# Altium PCB NewXTX_2CPU.PcbDoc (part 2 of 2)
Units mm, origin at the board's own origin, x right, y up, seen from the top; angles counter-clockwise.
Board outline 290 x 98 mm, 2 copper layers (Top Layer, Bottom Layer); 222 components, 212 nets, 1642 pads, 0 vias.
Unrouted connection lines stored in the file: 376.
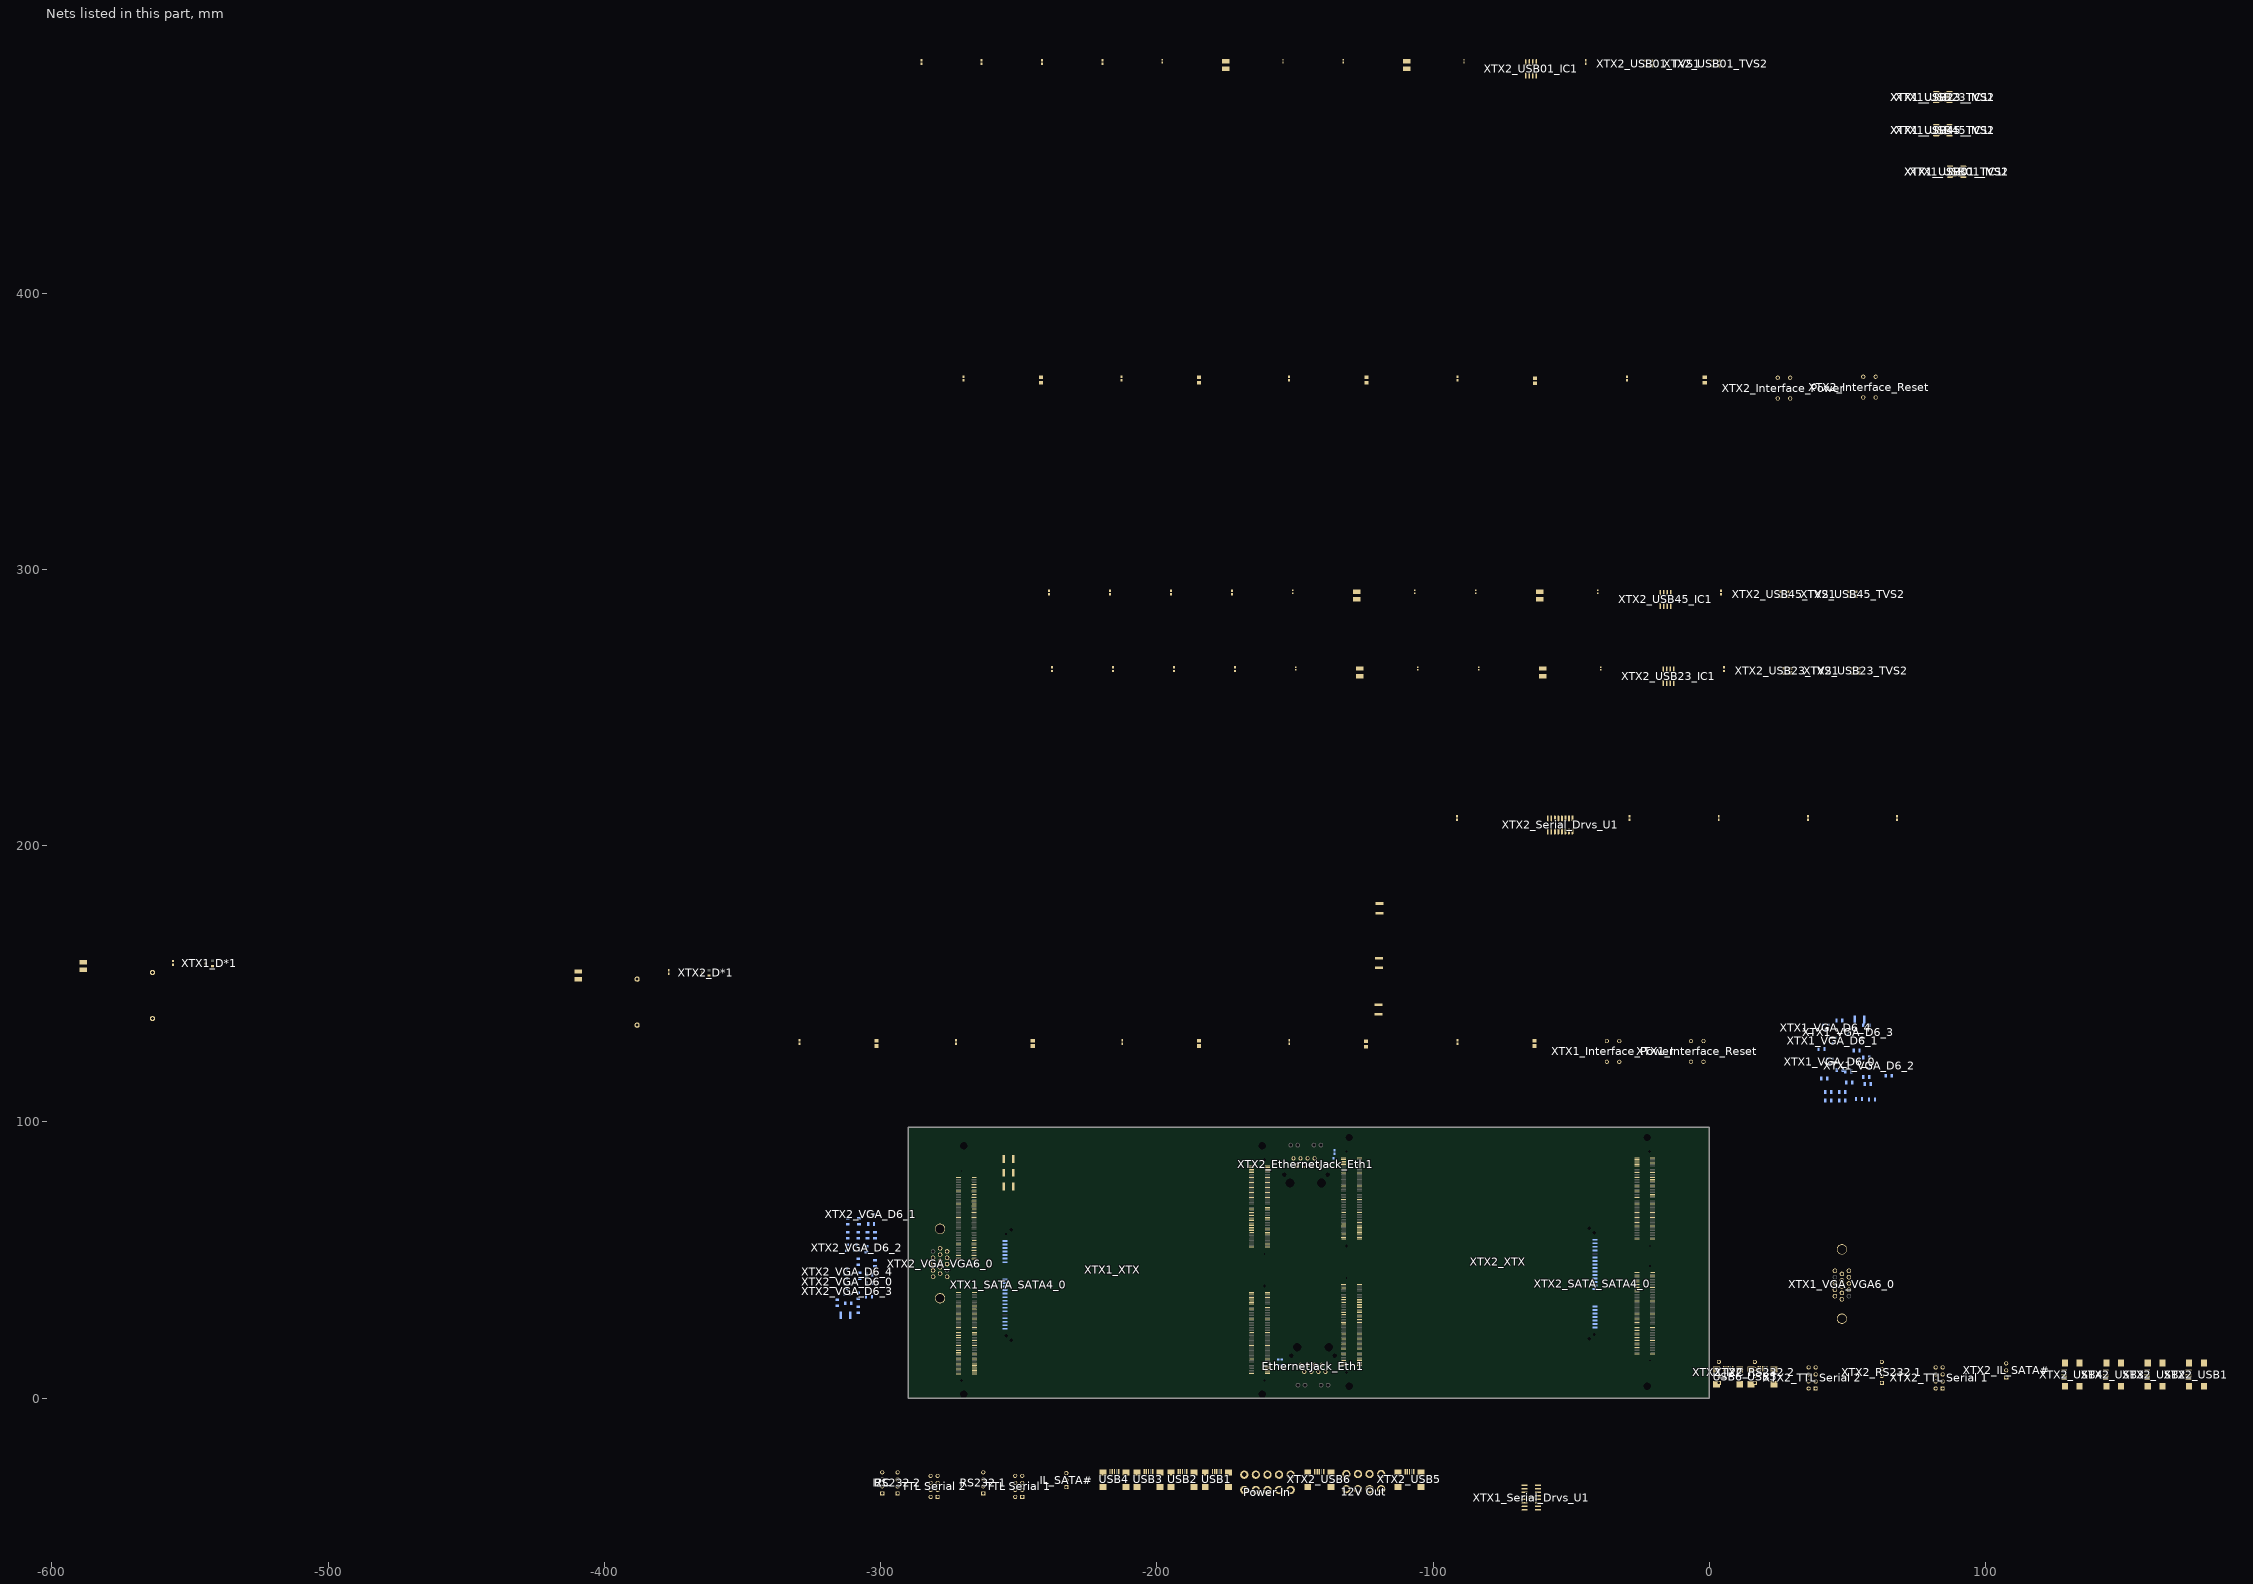
[diagram p2: the nets of this part, all layers, seen from the top]

## Footprints (in the part's own frame and the unit in brackets; to place one, negate y for a bottom-side part, rotate by r counter-clockwise, add the part's x,y. Pads: shape width x height; smd on the part's side, far side on the other; paste and mask are expansions set on the pad) (continued)
"R 0805 (2012) RESISTOR" [mm] "0805 (2012) Resistor"
  rect 0.85x1.4 smd: 1(-1.075,0) 2(1.075,0)
  silkscreen extent -1.78,-0.95 1.77,0.95, body extent -1.19,-0.65 1.19,0.65, height 0.85
"R 1210 (3225) RESISTOR" [mm] "1210 (3225) Resistor"
  rect 0.95x2.8 smd: 1(-1.725,0) 2(1.725,0)
  silkscreen extent -2.45,-1.62 2.45,1.65, body extent -1.83,-1.43 1.83,1.43, height 1.81
"SATA HDD" [mm] "FCI Part# 10029364 With HDD Holes and Screen"
  rect 1.9x0.65 smd: P1(-16.659,26.095) P2(-16.659,27.365) P3(-16.659,28.635) P4(-16.659,29.905) P5(-16.659,31.175) P6(-16.659,32.445) P7(-16.659,33.715) P8(-16.659,34.985) P9(-16.659,36.255) P10(-16.659,37.525) P11(-16.659,38.795) P12(-16.659,40.065) P13(-16.659,41.335) P14(-16.659,42.605) P15(-16.659,43.875) S1(-16.65,12.155) S2(-16.65,13.425) S3(-16.65,14.695) S4(-16.65,15.965) S5(-16.65,17.235) S6(-16.65,18.505) S7(-16.65,19.775)
  round 0 hole 0.95 unplated: ""(-16.3,9.6)
  round 0 hole 1.25 unplated: ""(-16.3,46.4) ""(-14.5,8) ""(-14.5,48)
  silkscreen extent -19.52,0 19.5,54, body extent -19.5,0 19.5,54, height 5.45
SOT23 [mm]
  rect 0.8x0.9 smd: 1(0.95,1) 2(-0.95,1) 3(0,-1)
  silkscreen extent -1.53,-0.7 1.53,0.7, body extent -1.52,-0.7 1.52,0.7, height 1.11
SOT143 [mm] "SOT-143; 4 Leads; Body 3 x 2.6 mm, inc. leads (LxW max)"
  rect 1.35x1.35 smd: 1(-0.75,-1.1)
  rect 0.9x1.35 smd: 2(0.95,-1.1) 3(0.95,1.1) 4(-0.95,1.1)
  silkscreen extent -1.87,-2.22 1.75,0.7
SOT-23 [mm] "SOT-23; 3 Leads; Body 3.0 x 2.6 mm, inc. leads (LxW max)"
  rect 0.9x0.95 smd: 1(-0.95,-1.25) 2(0.95,-1.25) 3(0,1.25)
  silkscreen extent -2.07,-1.38 1.3,1.25
UX60-MB-5ST [mm] "miniUSB Type B Connector - Metal Shield SMT With Positioning Post"
  rect 0.5x2 smd: 1(-1.6,-1) 2(-0.8,-1) 3(0,-1) 4(0.8,-1) 5(1.6,-1)
  rect 0x0 hole 0.9 unplated: 11(1.75,-3.25) 12(-1.75,-3.25)
  rect 2.5x2.2 smd: CGND(-4.2,-6.55) CGND(-4.2,-1.25) CGND(4.2,-6.55) CGND(4.2,-1.25)
  silkscreen extent -3.85,-9.72 3.85,-0.78, body extent -4.95,-9.55 4.95,-0.55, height 3.94
XTX_Board [mm]
  round 0 hole 0.7 unplated: 0(-111.85,41.65) 0(-111.85,87.45) 0(-2.025,53.25) 0(-2,11.65)
  round 0 hole 1.1 unplated: 0(-111.8,7.45) 0(-111.8,53.25) 0(-2.075,87.45) 0(-2.05,45.85)
  round 0 hole 2.7 unplated: 0(-110.9,2.45) 0(-110.9,92.45) 0(-2.9,92.45) 0(-2.9,2.45)
  rrect50% 1.8x0.35 smd: 1(-1,43.5) 2(-6.7,43.5) 3(-1,42.9) 4(-6.7,42.9) 5(-1,42.3) 6(-6.7,42.3) 7(-1,41.7) 8(-6.7,41.7) 9(-1,41.1) 10(-6.7,41.1) 11(-1,40.5) 12(-6.7,40.5) 13(-1,39.9) 14(-6.7,39.9) 15(-1,39.3) 16(-6.7,39.3) 17(-1,38.7) 18(-6.7,38.7) 19(-1,38.1) 20(-6.7,38.1) 21(-1,37.5) 22(-6.7,37.5) 23(-1,36.9) 24(-6.7,36.9) 25(-1,36.3) 26(-6.7,36.3) 27(-1,35.7) 28(-6.7,35.7) 29(-1,35.1) 30(-6.7,35.1) 31(-1,34.5) 32(-6.7,34.5) 33(-1,33.9) 34(-6.7,33.9) 35(-1,33.3) 36(-6.7,33.3) 37(-1,32.7) 38(-6.7,32.7) 39(-1,32.1) 40(-6.7,32.1) 41(-1,31.5) 42(-6.7,31.5) 43(-1,30.9) 44(-6.7,30.9) 45(-1,30.3) 46(-6.7,30.3) 47(-1,29.7) 48(-6.7,29.7) 49(-1,29.1) 50(-6.7,29.1) 51(-1,28.5) 52(-6.7,28.5) 53(-1,27.9) 54(-6.7,27.9) 55(-1,27.3) 56(-6.7,27.3) 57(-1,26.7) 58(-6.7,26.7) 59(-1,26.1) 60(-6.7,26.1) 61(-1,25.5) 62(-6.7,25.5) 63(-1,24.9) 64(-6.7,24.9) 65(-1,24.3) 66(-6.7,24.3) 67(-1,23.7) 68(-6.7,23.7) 69(-1,23.1) 70(-6.7,23.1) 71(-1,22.5) 72(-6.7,22.5) 73(-1,21.9) 74(-6.7,21.9) 75(-1,21.3) 76(-6.7,21.3) 77(-1,20.7) 78(-6.7,20.7) 79(-1,20.1) 80(-6.7,20.1) 81(-1,19.5) 82(-6.7,19.5) 83(-1,18.9) 84(-6.7,18.9) 85(-1,18.3) 86(-6.7,18.3) 87(-1,17.7) 88(-6.7,17.7) 89(-1,17.1) 90(-6.7,17.1) 91(-1,16.5) 92(-6.7,16.5) 93(-1,15.9) 94(-6.7,15.9) 95(-1,15.3) 96(-6.7,15.3) 97(-1,14.7) 98(-6.7,14.7) 99(-1,14.1) 100(-6.7,14.1) 101(-1.025,85.1) 102(-6.725,85.1) 103(-1.025,84.5) 104(-6.725,84.5) 105(-1.025,83.9) 106(-6.725,83.9) 107(-1.025,83.3) 108(-6.725,83.3) 109(-1.025,82.7) 110(-6.725,82.7) 111(-1.025,82.1) 112(-6.725,82.1) 113(-1.025,81.5) 114(-6.725,81.5) 115(-1.025,80.9) 116(-6.725,80.9) 117(-1.025,80.3) 118(-6.725,80.3) 119(-1.025,79.7) 120(-6.725,79.7) 121(-1.025,79.1) 122(-6.725,79.1) 123(-1.025,78.5) 124(-6.725,78.5) 125(-1.025,77.9) 126(-6.725,77.9) 127(-1.025,77.3) 128(-6.725,77.3) 129(-1.025,76.7) 130(-6.725,76.7) 131(-1.025,76.1) 132(-6.725,76.1) 133(-1.025,75.5) 134(-6.725,75.5) 135(-1.025,74.9) 136(-6.725,74.9) 137(-1.025,74.3) 138(-6.725,74.3) 139(-1.025,73.7) 140(-6.725,73.7) 141(-1.025,73.1) 142(-6.725,73.1) 143(-1.025,72.5) 144(-6.725,72.5) 145(-1.025,71.9) 146(-6.725,71.9) 147(-1.025,71.3) 148(-6.725,71.3) 149(-1.025,70.7) 150(-6.725,70.7) 151(-1.025,70.1) 152(-6.725,70.1) 153(-1.025,69.5) 154(-6.725,69.5) 155(-1.025,68.9) 156(-6.725,68.9) 157(-1.025,68.3) 158(-6.725,68.3) 159(-1.025,67.7) 160(-6.725,67.7) 161(-1.025,67.1) 162(-6.725,67.1) 163(-1.025,66.5) 164(-6.725,66.5) 165(-1.025,65.9) 166(-6.725,65.9) 167(-1.025,65.3) 168(-6.725,65.3) 169(-1.025,64.7) 170(-6.725,64.7) 171(-1.025,64.1) 172(-6.725,64.1) 173(-1.025,63.5) 174(-6.725,63.5) 175(-1.025,62.9) 176(-6.725,62.9) 177(-1.025,62.3) 178(-6.725,62.3) 179(-1.025,61.7) 180(-6.725,61.7) 181(-1.025,61.1) 182(-6.725,61.1) 183(-1.025,60.5) 184(-6.725,60.5) 185(-1.025,59.9) 186(-6.725,59.9) 187(-1.025,59.3) 188(-6.725,59.3) 189(-1.025,58.7) 190(-6.725,58.7) 191(-1.025,58.1) 192(-6.725,58.1) 193(-1.025,57.5) 194(-6.725,57.5) 195(-1.025,56.9) 196(-6.725,56.9) 197(-1.025,56.3) 198(-6.725,56.3) 199(-1.025,55.7) 200(-6.725,55.7) 201(-112.85,9.85) 202(-107.15,9.85) 203(-112.85,10.45) 204(-107.15,10.45) 205(-112.85,11.05) 206(-107.15,11.05) 207(-112.85,11.65) 208(-107.15,11.65) 209(-112.85,12.25) 210(-107.15,12.25) 211(-112.85,12.85) 212(-107.15,12.85) 213(-112.85,13.45) 214(-107.15,13.45) 215(-112.85,14.05) 216(-107.15,14.05) 217(-112.85,14.65) 218(-107.15,14.65) 219(-112.85,15.25) 220(-107.15,15.25) 221(-112.85,15.85) 222(-107.15,15.85) 223(-112.85,16.45) 224(-107.15,16.45) 225(-112.85,17.05) 226(-107.15,17.05) 227(-112.85,17.65) 228(-107.15,17.65) 229(-112.85,18.25) 230(-107.15,18.25) 231(-112.85,18.85) 232(-107.15,18.85) 233(-112.85,19.45) 234(-107.15,19.45) 235(-112.85,20.05) 236(-107.15,20.05) 237(-112.85,20.65) 238(-107.15,20.65) 239(-112.85,21.25) 240(-107.15,21.25) 241(-112.85,21.85) 242(-107.15,21.85) 243(-112.85,22.45) 244(-107.15,22.45) 245(-112.85,23.05) 246(-107.15,23.05) 247(-112.85,23.65) 248(-107.15,23.65) 249(-112.85,24.25) 250(-107.15,24.25) 251(-112.85,24.85) 252(-107.15,24.85) 253(-112.85,25.45) 254(-107.15,25.45) 255(-112.85,26.05) 256(-107.15,26.05) 257(-112.85,26.65) 258(-107.15,26.65) 259(-112.85,27.25) 260(-107.15,27.25) 261(-112.85,27.85) 262(-107.15,27.85) 263(-112.85,28.45) 264(-107.15,28.45) 265(-112.85,29.05) 266(-107.15,29.05) 267(-112.85,29.65) 268(-107.15,29.65) 269(-112.85,30.25) 270(-107.15,30.25) 271(-112.85,30.85) 272(-107.15,30.85) 273(-112.85,31.45) 274(-107.15,31.45) 275(-112.85,32.05) 276(-107.15,32.05) 277(-112.85,32.65) 278(-107.15,32.65) 279(-112.85,33.25) 280(-107.15,33.25) 281(-112.85,33.85) 282(-107.15,33.85) 283(-112.85,34.45) 284(-107.15,34.45) 285(-112.85,35.05) 286(-107.15,35.05) 287(-112.85,35.65) 288(-107.15,35.65) 289(-112.85,36.25) 290(-107.15,36.25) 291(-112.85,36.85) 292(-107.15,36.85) 293(-112.85,37.45) 294(-107.15,37.45) 295(-112.85,38.05) 296(-107.15,38.05) 297(-112.85,38.65) 298(-107.15,38.65) 299(-112.85,39.25) 300(-107.15,39.25) 301(-112.85,55.65) 302(-107.15,55.65) 303(-112.85,56.25) 304(-107.15,56.25) 305(-112.85,56.85) 306(-107.15,56.85) 307(-112.85,57.45) 308(-107.15,57.45) 309(-112.85,58.05) 310(-107.15,58.05) 311(-112.85,58.65) 312(-107.15,58.65) 313(-112.85,59.25) 314(-107.15,59.25) 315(-112.85,59.85) 316(-107.15,59.85) 317(-112.85,60.45) 318(-107.15,60.45) 319(-112.85,61.05) 320(-107.15,61.05) 321(-112.85,61.65) 322(-107.15,61.65) 323(-112.85,62.25) 324(-107.15,62.25) 325(-112.85,62.85) 326(-107.15,62.85) 327(-112.85,63.45) 328(-107.15,63.45) 329(-112.85,64.05) 330(-107.15,64.05) 331(-112.85,64.65) 332(-107.15,64.65) 333(-112.85,65.25) 334(-107.15,65.25) 335(-112.85,65.85) 336(-107.15,65.85) 337(-112.85,66.45) 338(-107.15,66.45) 339(-112.85,67.05) 340(-107.15,67.05) 341(-112.85,67.65) 342(-107.15,67.65) 343(-112.85,68.25) 344(-107.15,68.25) 345(-112.85,68.85) 346(-107.15,68.85) 347(-112.85,69.45) 348(-107.15,69.45) 349(-112.85,70.05) 350(-107.15,70.05) 351(-112.85,70.65) 352(-107.15,70.65) 353(-112.85,71.25) 354(-107.15,71.25) 355(-112.85,71.85) 356(-107.15,71.85) 357(-112.85,72.45) 358(-107.15,72.45) 359(-112.85,73.05) 360(-107.15,73.05) 361(-112.85,73.65) 362(-107.15,73.65) 363(-112.85,74.25) 364(-107.15,74.25) 365(-112.85,74.85) 366(-107.15,74.85) 367(-112.85,75.45) 368(-107.15,75.45) 369(-112.85,76.05) 370(-107.15,76.05) 371(-112.85,76.65) 372(-107.15,76.65) 373(-112.85,77.25) 374(-107.15,77.25) 375(-112.85,77.85) 376(-107.15,77.85) 377(-112.85,78.45) 378(-107.15,78.45) 379(-112.85,79.05) 380(-107.15,79.05) 381(-112.85,79.65) 382(-107.15,79.65) 383(-112.85,80.25) 384(-107.15,80.25) 385(-112.85,80.85) 386(-107.15,80.85) 387(-112.85,81.45) 388(-107.15,81.45) 389(-112.85,82.05) 390(-107.15,82.05) 391(-112.85,82.65) 392(-107.15,82.65) 393(-112.85,83.25) 394(-107.15,83.25) 395(-112.85,83.85) 396(-107.15,83.85) 397(-112.85,84.45) 398(-107.15,84.45) 399(-112.85,85.05) 400(-107.15,85.05)
  silkscreen extent -113.9,-0.05 0.1,94.95, body extent -114,0 0,95, height 19.2

## Part data
EthernetJack_C25 EthernetJack_C26 XTX1_C16 XTX1_Serial_Drvs_C20 XTX1_Serial_Drvs_C21 XTX1_Serial_Drvs_C22 XTX1_Serial_Drvs_C23 XTX1_Serial_Drvs_C24 XTX1_USB01_C1 XTX1_USB01_C2 XTX1_USB01_C3 XTX1_USB01_C4 XTX1_USB01_C5 XTX1_USB01_C6 XTX1_USB01_C7 XTX1_USB23_C1 XTX1_USB23_C2 XTX1_USB23_C3 XTX1_USB23_C4 XTX1_USB23_C5 XTX1_USB23_C6 XTX1_USB23_C7 XTX1_USB45_C1 XTX1_USB45_C2 XTX1_USB45_C3 XTX1_USB45_C4 XTX1_USB45_C5 XTX1_USB45_C6 XTX1_USB45_C7 XTX2_C16 XTX2_EthernetJack_C25 XTX2_EthernetJack_C26 XTX2_Serial_Drvs_C20 XTX2_Serial_Drvs_C21 XTX2_Serial_Drvs_C22 XTX2_Serial_Drvs_C23 XTX2_Serial_Drvs_C24 XTX2_USB01_C1 XTX2_USB01_C2 XTX2_USB01_C3 XTX2_USB01_C4 XTX2_USB01_C5 XTX2_USB01_C6 XTX2_USB01_C7 XTX2_USB23_C1 XTX2_USB23_C2 XTX2_USB23_C3 XTX2_USB23_C4 XTX2_USB23_C5 XTX2_USB23_C6 XTX2_USB23_C7 XTX2_USB45_C1 XTX2_USB45_C2 XTX2_USB45_C3 XTX2_USB45_C4 XTX2_USB45_C5 XTX2_USB45_C6 XTX2_USB45_C7: "Capacitor (Semiconductor SIM Model)"
EthernetJack_Eth1 XTX2_EthernetJack_Eth1: "Modular RJ45 Jack w/ Magnetics & LEDs"
I2C "RS232 1" "RS232 2" XTX2_I2C "XTX2_RS232 1" "XTX2_RS232 2": "Header, 4-Pin"
IL_SATA# XTX2_IL_SATA#: "Header, 3-Pin"
"TTL Serial 1" "TTL Serial 2" "XTX2_TTL Serial 1" "XTX2_TTL Serial 2": "Header, 4-Pin, Dual row"
USB1 USB2 USB3 USB4 USB5 USB6 XTX2_USB1 XTX2_USB2 XTX2_USB3 XTX2_USB4 XTX2_USB5 XTX2_USB6: "miniUSB Type B SMT Connector"
XTX1_BATT1 XTX2_BATT1: "16mm Battery Holder - Memory Protection Devices"
XTX1_D*1 XTX2_D*1: "Dual Surface Mount Switching Diode"
XTX1_Interface_5V "XTX1_Interface_Eth Act" "XTX1_Interface_Eth Lil" "XTX1_Interface_Eth Spd" XTX1_Interface_SATA XTX2_Interface_5V "XTX2_Interface_Eth Act" "XTX2_Interface_Eth Lil" "XTX2_Interface_Eth Spd" XTX2_Interface_SATA: "Typical RED, GREEN, YELLOW, AMBER GaAs LED"
XTX1_Interface_Power XTX1_Interface_Reset XTX2_Interface_Power XTX2_Interface_Reset: "FSM 6mm Series Switch"
XTX1_Interface_R14 XTX1_Interface_R15 XTX1_Interface_R16 XTX1_Interface_R17 XTX1_Interface_R18 XTX1_R8 XTX2_Interface_R14 XTX2_Interface_R15 XTX2_Interface_R16 XTX2_Interface_R17 XTX2_Interface_R18 XTX2_R8: "Semiconductor Resistor"
XTX1_SATA_C4_0 XTX1_SATA_C4_1 XTX1_SATA_C4_2 XTX1_VGA_C6_0 XTX1_VGA_C6_1 XTX1_VGA_C6_2 XTX1_VGA_C6_3 XTX1_VGA_C6_4 XTX1_VGA_C6_5 XTX1_VGA_C6_6 XTX1_VGA_C6_7 XTX2_SATA_C4_0 XTX2_SATA_C4_1 XTX2_SATA_C4_2 XTX2_VGA_C6_0 XTX2_VGA_C6_1 XTX2_VGA_C6_2 XTX2_VGA_C6_3 XTX2_VGA_C6_4 XTX2_VGA_C6_5 XTX2_VGA_C6_6 XTX2_VGA_C6_7: library part "Capacitor (non-polarized)", "Capacitor"
XTX1_SATA_SATA4_0 XTX2_SATA_SATA4_0: "SATA HDD, FCI Part# 10029364"
XTX1_Serial_Drvs_U1 XTX2_Serial_Drvs_U1: "+5V Powered, Multi-Channel RS-232 Driver/Receiver"
XTX1_USB01_IC1 XTX1_USB23_IC1 XTX1_USB45_IC1 XTX2_USB01_IC1 XTX2_USB23_IC1 XTX2_USB45_IC1: library part MIC2026, "Micrel MIC2026 Dual-Channel Power Distribution Switch"
XTX1_USB01_TVS1 XTX1_USB01_TVS2 XTX1_USB23_TVS1 XTX1_USB23_TVS2 XTX1_USB45_TVS1 XTX1_USB45_TVS2 XTX2_USB01_TVS1 XTX2_USB01_TVS2 XTX2_USB23_TVS1 XTX2_USB23_TVS2 XTX2_USB45_TVS1 XTX2_USB45_TVS2: "IC TVS ARRAY 2-LINE 5V SOT-143"
XTX1_VGA_D6_0 XTX1_VGA_D6_3 XTX2_VGA_D6_0 XTX2_VGA_D6_3: library part "Dual Schottky Diode", "Dual Schottky Diode"
XTX1_VGA_FB6_0 XTX1_VGA_FB6_1 XTX1_VGA_FB6_2 XTX1_VGA_FB6_3 XTX1_VGA_FB6_4 XTX1_VGA_FB6_5 XTX1_VGA_FB6_6 XTX1_VGA_FB6_7 XTX2_VGA_FB6_0 XTX2_VGA_FB6_1 XTX2_VGA_FB6_2 XTX2_VGA_FB6_3 XTX2_VGA_FB6_4 XTX2_VGA_FB6_5 XTX2_VGA_FB6_6 XTX2_VGA_FB6_7: library part "Ferrite Beads", "Ferrite Beads"
XTX1_VGA_R6_0 XTX1_VGA_R6_1 XTX1_VGA_R6_2 XTX1_VGA_R6_3 XTX2_VGA_R6_0 XTX2_VGA_R6_1 XTX2_VGA_R6_2 XTX2_VGA_R6_3: library part Resistor, "Resistor"
XTX1_VGA_VGA6_0 XTX2_VGA_VGA6_0: "DSub15 Connector Tyco PN 1734344"

## Nets (pads, with @x,y where several pads share a name; then routed paths per layer and width w, separated by ;. In a path a pad name is that pad's centre, name@x,y a point inside that pad or via, vN(x,y) a via of type N, cw(c..) or ccw(c..) an arc to the next point about the centre after c; other vN are vias at no path point)
3.3VCC: XTX1_SATA_C4_0.2 XTX1_SATA_C4_1.2 XTX1_SATA_C4_2.2 XTX1_SATA_SATA4_0.P1 XTX1_SATA_SATA4_0.P2 XTX1_SATA_SATA4_0.P3 XTX1_VGA_D6_0.2 XTX1_VGA_D6_1.2 XTX1_VGA_D6_2.2 XTX1_VGA_D6_3.2 XTX1_VGA_D6_4.2 XTX1_VGA_FB6_3.1 XTX1_XTX.12 XTX1_XTX.16 XTX1_XTX.24 XTX2_SATA_C4_0.2 XTX2_SATA_C4_1.2 XTX2_SATA_C4_2.2 XTX2_SATA_SATA4_0.P1 XTX2_SATA_SATA4_0.P2 XTX2_SATA_SATA4_0.P3 XTX2_VGA_D6_0.2 XTX2_VGA_D6_1.2 XTX2_VGA_D6_2.2 XTX2_VGA_D6_3.2 XTX2_VGA_D6_4.2 XTX2_VGA_FB6_3.1 XTX2_XTX.12 XTX2_XTX.16 XTX2_XTX.24
5VCC: XTX1_Interface_5V.1 XTX1_Interface_R14.1 XTX1_Interface_R15.1 XTX1_Interface_R16.1 XTX1_Interface_R17.1 XTX1_SATA_SATA4_0.P7 XTX1_SATA_SATA4_0.P8 XTX1_SATA_SATA4_0.P9 XTX1_Serial_Drvs_C22.1 XTX1_Serial_Drvs_C23.1 XTX1_Serial_Drvs_U1.16 XTX1_XTX.19 XTX1_XTX.20 XTX1_XTX.51 XTX1_XTX.52 XTX1_XTX.83 XTX1_XTX.84 XTX1_XTX.114 XTX1_XTX.119 XTX1_XTX.120 XTX1_XTX.151 XTX1_XTX.152 XTX1_XTX.174 XTX1_XTX.180 XTX1_XTX.183 XTX1_XTX.184 XTX1_XTX.239 XTX1_XTX.240 XTX1_XTX.251 XTX1_XTX.253 XTX1_XTX.281 XTX1_XTX.282 XTX1_XTX.303 XTX1_XTX.317 XTX1_XTX.318 XTX1_XTX.349 XTX1_XTX.350 XTX1_XTX.381 XTX1_XTX.382 XTX2_Interface_5V.1 XTX2_Interface_R14.1 XTX2_Interface_R15.1 XTX2_Interface_R16.1 XTX2_Interface_R17.1 XTX2_SATA_SATA4_0.P7 XTX2_SATA_SATA4_0.P8 XTX2_SATA_SATA4_0.P9 XTX2_Serial_Drvs_C22.1 XTX2_Serial_Drvs_C23.1 XTX2_Serial_Drvs_U1.16 XTX2_XTX.19 XTX2_XTX.20 XTX2_XTX.51 XTX2_XTX.52 XTX2_XTX.83 XTX2_XTX.84 XTX2_XTX.114 XTX2_XTX.119 XTX2_XTX.120 XTX2_XTX.151 XTX2_XTX.152 XTX2_XTX.174 XTX2_XTX.180 XTX2_XTX.183 XTX2_XTX.184 XTX2_XTX.239 XTX2_XTX.240 XTX2_XTX.251 XTX2_XTX.253 XTX2_XTX.281 XTX2_XTX.282 XTX2_XTX.303 XTX2_XTX.317 XTX2_XTX.318 XTX2_XTX.349 XTX2_XTX.350 XTX2_XTX.381 XTX2_XTX.382
12VCC: "12V Out.1" "12V Out.2" "12V Out.3" "12V Out.4" "Power In.1" "Power In.6" XTX1_SATA_SATA4_0.P13 XTX1_SATA_SATA4_0.P14 XTX1_SATA_SATA4_0.P15 XTX2_SATA_SATA4_0.P13 XTX2_SATA_SATA4_0.P14 XTX2_SATA_SATA4_0.P15
GND: "12V Out.5" "12V Out.6" "12V Out.7" "12V Out.8" "Power In.4" "Power In.5" "Power In.9" "Power In.10" "RS232 1.4" "RS232 2.4" "TTL Serial 1.7" "TTL Serial 1.8" "TTL Serial 2.7" "TTL Serial 2.8" "XTX2_RS232 1.4" "XTX2_RS232 2.4" "XTX2_TTL Serial 1.7" "XTX2_TTL Serial 1.8" "XTX2_TTL Serial 2.7" "XTX2_TTL Serial 2.8" EthernetJack_C25.1 EthernetJack_C26.1 EthernetJack_Eth1.4 EthernetJack_Eth1.5 I2C.4 IL_SATA#.3 XTX1_BATT1.- XTX1_C16.1 XTX1_Interface_Power.3 XTX1_Interface_Power.4 XTX1_Interface_R18.1 XTX1_Interface_Reset.3 XTX1_Interface_Reset.4 XTX1_SATA_C4_0.1 XTX1_SATA_C4_1.1 XTX1_SATA_C4_2.1 XTX1_SATA_SATA4_0.P4 XTX1_SATA_SATA4_0.P5 XTX1_SATA_SATA4_0.P6 XTX1_SATA_SATA4_0.P10 XTX1_SATA_SATA4_0.P12 XTX1_SATA_SATA4_0.S1 XTX1_SATA_SATA4_0.S4 XTX1_SATA_SATA4_0.S7 XTX1_Serial_Drvs_C23.2 XTX1_Serial_Drvs_C24.2 XTX1_Serial_Drvs_U1.15 XTX1_USB01_C1.1 XTX1_USB01_C2.1 XTX1_USB01_C3.1 XTX1_USB01_C4.1 XTX1_USB01_C5.1 XTX1_USB01_C6.1 XTX1_USB01_C7.1 XTX1_USB01_IC1.6 XTX1_USB01_L2.1 XTX1_USB01_L4.1 XTX1_USB01_TVS1.1 XTX1_USB01_TVS2.4 XTX1_USB23_C1.1 XTX1_USB23_C2.1 XTX1_USB23_C3.1 XTX1_USB23_C4.1 XTX1_USB23_C5.1 XTX1_USB23_C6.1 XTX1_USB23_C7.1 XTX1_USB23_IC1.6 XTX1_USB23_L2.1 XTX1_USB23_L4.1 XTX1_USB23_TVS1.1 XTX1_USB23_TVS2.4 XTX1_USB45_C1.1 XTX1_USB45_C2.1 XTX1_USB45_C3.1 XTX1_USB45_C4.1 XTX1_USB45_C5.1 XTX1_USB45_C6.1 XTX1_USB45_C7.1 XTX1_USB45_IC1.6 XTX1_USB45_L2.1 XTX1_USB45_L4.1 XTX1_USB45_TVS1.1 XTX1_USB45_TVS2.4 XTX1_VGA_C6_0.2 XTX1_VGA_C6_1.2 XTX1_VGA_C6_2.2 XTX1_VGA_C6_3.2 XTX1_VGA_C6_4.2 XTX1_VGA_C6_5.2 XTX1_VGA_C6_6.1 XTX1_VGA_C6_7.1 XTX1_VGA_D6_0.1 XTX1_VGA_D6_1.1 XTX1_VGA_D6_2.1 XTX1_VGA_D6_3.1 XTX1_VGA_D6_4.1 XTX1_VGA_R6_0.1 XTX1_VGA_R6_1.1 XTX1_VGA_R6_2.1 XTX1_VGA_R6_3.1 XTX1_VGA_VGA6_0.5 XTX1_VGA_VGA6_0.6 XTX1_VGA_VGA6_0.7 XTX1_VGA_VGA6_0.8 XTX1_VGA_VGA6_0.10 XTX1_XTX.1 XTX1_XTX.2 XTX1_XTX.5 XTX1_XTX.6 XTX1_XTX.35 XTX1_XTX.36 XTX1_XTX.67 XTX1_XTX.68 XTX1_XTX.99 XTX1_XTX.100 XTX1_XTX.101 XTX1_XTX.102 XTX1_XTX.107 XTX1_XTX.108 XTX1_XTX.113 XTX1_XTX.126 XTX1_XTX.129 XTX1_XTX.135 XTX1_XTX.136 XTX1_XTX.142 XTX1_XTX.157 XTX1_XTX.167 XTX1_XTX.168 XTX1_XTX.173 XTX1_XTX.199 XTX1_XTX.200 XTX1_XTX.201 XTX1_XTX.202 XTX1_XTX.215 XTX1_XTX.216 XTX1_XTX.221 XTX1_XTX.222 XTX1_XTX.227 XTX1_XTX.228 XTX1_XTX.233 XTX1_XTX.234 XTX1_XTX.254 XTX1_XTX.265 XTX1_XTX.266 XTX1_XTX.299 XTX1_XTX.300 XTX1_XTX.301 XTX1_XTX.302 XTX1_XTX.333 XTX1_XTX.334 XTX1_XTX.365 XTX1_XTX.366 XTX1_XTX.399 XTX1_XTX.400 XTX2_BATT1.- XTX2_C16.1 XTX2_EthernetJack_C25.1 XTX2_EthernetJack_C26.1 XTX2_EthernetJack_Eth1.4 XTX2_EthernetJack_Eth1.5 XTX2_I2C.4 XTX2_IL_SATA#.3 XTX2_Interface_Power.3 XTX2_Interface_Power.4 XTX2_Interface_R18.1 XTX2_Interface_Reset.3 XTX2_Interface_Reset.4 XTX2_SATA_C4_0.1 XTX2_SATA_C4_1.1 XTX2_SATA_C4_2.1 XTX2_SATA_SATA4_0.P4 XTX2_SATA_SATA4_0.P5 XTX2_SATA_SATA4_0.P6 XTX2_SATA_SATA4_0.P10 XTX2_SATA_SATA4_0.P12 XTX2_SATA_SATA4_0.S1 XTX2_SATA_SATA4_0.S4 XTX2_SATA_SATA4_0.S7 XTX2_Serial_Drvs_C23.2 XTX2_Serial_Drvs_C24.2 XTX2_Serial_Drvs_U1.15 XTX2_USB01_C1.1 XTX2_USB01_C2.1 XTX2_USB01_C3.1 XTX2_USB01_C4.1 XTX2_USB01_C5.1 XTX2_USB01_C6.1 XTX2_USB01_C7.1 XTX2_USB01_IC1.6 XTX2_USB01_L2.1 XTX2_USB01_L4.1 XTX2_USB01_TVS1.1 XTX2_USB01_TVS2.4 XTX2_USB23_C1.1 XTX2_USB23_C2.1 XTX2_USB23_C3.1 XTX2_USB23_C4.1 XTX2_USB23_C5.1 XTX2_USB23_C6.1 XTX2_USB23_C7.1 XTX2_USB23_IC1.6 XTX2_USB23_L2.1 XTX2_USB23_L4.1 XTX2_USB23_TVS1.1 XTX2_USB23_TVS2.4 XTX2_USB45_C1.1 XTX2_USB45_C2.1 XTX2_USB45_C3.1 XTX2_USB45_C4.1 XTX2_USB45_C5.1 XTX2_USB45_C6.1 XTX2_USB45_C7.1 XTX2_USB45_IC1.6 XTX2_USB45_L2.1 XTX2_USB45_L4.1 XTX2_USB45_TVS1.1 XTX2_USB45_TVS2.4 XTX2_VGA_C6_0.2 XTX2_VGA_C6_1.2 XTX2_VGA_C6_2.2 XTX2_VGA_C6_3.2 XTX2_VGA_C6_4.2 XTX2_VGA_C6_5.2 XTX2_VGA_C6_6.1 XTX2_VGA_C6_7.1 XTX2_VGA_D6_0.1 XTX2_VGA_D6_1.1 XTX2_VGA_D6_2.1 XTX2_VGA_D6_3.1 XTX2_VGA_D6_4.1 XTX2_VGA_R6_0.1 XTX2_VGA_R6_1.1 XTX2_VGA_R6_2.1 XTX2_VGA_R6_3.1 XTX2_VGA_VGA6_0.5 XTX2_VGA_VGA6_0.6 XTX2_VGA_VGA6_0.7 XTX2_VGA_VGA6_0.8 XTX2_VGA_VGA6_0.10 XTX2_XTX.1 XTX2_XTX.2 XTX2_XTX.5 XTX2_XTX.6 XTX2_XTX.35 XTX2_XTX.36 XTX2_XTX.67 XTX2_XTX.68 XTX2_XTX.99 XTX2_XTX.100 XTX2_XTX.101 XTX2_XTX.102 XTX2_XTX.107 XTX2_XTX.108 XTX2_XTX.113 XTX2_XTX.126 XTX2_XTX.129 XTX2_XTX.135 XTX2_XTX.136 XTX2_XTX.142 XTX2_XTX.157 XTX2_XTX.167 XTX2_XTX.168 XTX2_XTX.173 XTX2_XTX.199 XTX2_XTX.200 XTX2_XTX.201 XTX2_XTX.202 XTX2_XTX.215 XTX2_XTX.216 XTX2_XTX.221 XTX2_XTX.222 XTX2_XTX.227 XTX2_XTX.228 XTX2_XTX.233 XTX2_XTX.234 XTX2_XTX.254 XTX2_XTX.265 XTX2_XTX.266 XTX2_XTX.299 XTX2_XTX.300 XTX2_XTX.301 XTX2_XTX.302 XTX2_XTX.333 XTX2_XTX.334 XTX2_XTX.365 XTX2_XTX.366 XTX2_XTX.399 XTX2_XTX.400
NetEthernetJack_C25_2: EthernetJack_C25.2 EthernetJack_Eth1.3
NetEthernetJack_C26_2: EthernetJack_C26.2 EthernetJack_Eth1.6
NetXTX1_BATT1_+: XTX1_BATT1.+ XTX1_D*1.1
NetXTX1_C16_2: XTX1_C16.2 XTX1_D*1.3 XTX1_R8.2
NetXTX1_Interface_5V_2: XTX1_Interface_5V.2 XTX1_Interface_R18.2
"NetXTX1_Interface_Eth Act_1": "XTX1_Interface_Eth Act.1" XTX1_Interface_R15.2
"NetXTX1_Interface_Eth Lil_1": "XTX1_Interface_Eth Lil.1" XTX1_Interface_R16.2
"NetXTX1_Interface_Eth Spd_1": "XTX1_Interface_Eth Spd.1" XTX1_Interface_R14.2
NetXTX1_Interface_R17_2: XTX1_Interface_R17.2 XTX1_Interface_SATA.1
NetXTX1_R8_1: XTX1_R8.1 XTX1_XTX.308
NetXTX1_Serial_Drvs_C20_1: XTX1_Serial_Drvs_C20.1 XTX1_Serial_Drvs_U1.4
NetXTX1_Serial_Drvs_C20_2: XTX1_Serial_Drvs_C20.2 XTX1_Serial_Drvs_U1.5
NetXTX1_Serial_Drvs_C21_1: XTX1_Serial_Drvs_C21.1 XTX1_Serial_Drvs_U1.1
NetXTX1_Serial_Drvs_C21_2: XTX1_Serial_Drvs_C21.2 XTX1_Serial_Drvs_U1.3
NetXTX1_Serial_Drvs_C22_2: XTX1_Serial_Drvs_C22.2 XTX1_Serial_Drvs_U1.2
NetXTX1_Serial_Drvs_C24_1: XTX1_Serial_Drvs_C24.1 XTX1_Serial_Drvs_U1.6
NetXTX1_USB01_C2_2: XTX1_USB01_C2.2 XTX1_USB01_IC1.5 XTX1_USB01_L1.1
NetXTX1_USB01_C3_2: XTX1_USB01_C3.2 XTX1_USB01_IC1.8 XTX1_USB01_L3.1
NetXTX1_USB23_C2_2: XTX1_USB23_C2.2 XTX1_USB23_IC1.5 XTX1_USB23_L1.1
NetXTX1_USB23_C3_2: XTX1_USB23_C3.2 XTX1_USB23_IC1.8 XTX1_USB23_L3.1
NetXTX1_USB45_C2_2: XTX1_USB45_C2.2 XTX1_USB45_IC1.5 XTX1_USB45_L1.1
NetXTX1_USB45_C3_2: XTX1_USB45_C3.2 XTX1_USB45_IC1.8 XTX1_USB45_L3.1
NetXTX1_VGA_FB6_3_2: XTX1_VGA_FB6_3.2 XTX1_VGA_VGA6_0.9
NetXTX2_BATT1_+: XTX2_BATT1.+ XTX2_D*1.1
NetXTX2_C16_2: XTX2_C16.2 XTX2_D*1.3 XTX2_R8.2
NetXTX2_EthernetJack_C25_2: XTX2_EthernetJack_C25.2 XTX2_EthernetJack_Eth1.3
NetXTX2_EthernetJack_C26_2: XTX2_EthernetJack_C26.2 XTX2_EthernetJack_Eth1.6
NetXTX2_Interface_5V_2: XTX2_Interface_5V.2 XTX2_Interface_R18.2
"NetXTX2_Interface_Eth Act_1": "XTX2_Interface_Eth Act.1" XTX2_Interface_R15.2
"NetXTX2_Interface_Eth Lil_1": "XTX2_Interface_Eth Lil.1" XTX2_Interface_R16.2
"NetXTX2_Interface_Eth Spd_1": "XTX2_Interface_Eth Spd.1" XTX2_Interface_R14.2
NetXTX2_Interface_R17_2: XTX2_Interface_R17.2 XTX2_Interface_SATA.1
NetXTX2_R8_1: XTX2_R8.1 XTX2_XTX.308
NetXTX2_Serial_Drvs_C20_1: XTX2_Serial_Drvs_C20.1 XTX2_Serial_Drvs_U1.4
NetXTX2_Serial_Drvs_C20_2: XTX2_Serial_Drvs_C20.2 XTX2_Serial_Drvs_U1.5
NetXTX2_Serial_Drvs_C21_1: XTX2_Serial_Drvs_C21.1 XTX2_Serial_Drvs_U1.1
NetXTX2_Serial_Drvs_C21_2: XTX2_Serial_Drvs_C21.2 XTX2_Serial_Drvs_U1.3
NetXTX2_Serial_Drvs_C22_2: XTX2_Serial_Drvs_C22.2 XTX2_Serial_Drvs_U1.2
NetXTX2_Serial_Drvs_C24_1: XTX2_Serial_Drvs_C24.1 XTX2_Serial_Drvs_U1.6
NetXTX2_USB01_C2_2: XTX2_USB01_C2.2 XTX2_USB01_IC1.5 XTX2_USB01_L1.1
NetXTX2_USB01_C3_2: XTX2_USB01_C3.2 XTX2_USB01_IC1.8 XTX2_USB01_L3.1
NetXTX2_USB23_C2_2: XTX2_USB23_C2.2 XTX2_USB23_IC1.5 XTX2_USB23_L1.1
NetXTX2_USB23_C3_2: XTX2_USB23_C3.2 XTX2_USB23_IC1.8 XTX2_USB23_L3.1
NetXTX2_USB45_C2_2: XTX2_USB45_C2.2 XTX2_USB45_IC1.5 XTX2_USB45_L1.1
NetXTX2_USB45_C3_2: XTX2_USB45_C3.2 XTX2_USB45_IC1.8 XTX2_USB45_L3.1
NetXTX2_VGA_FB6_3_2: XTX2_VGA_FB6_3.2 XTX2_VGA_VGA6_0.9
VCC: "Power In.2" "Power In.3" "Power In.7" "Power In.8" "RS232 1.1" "RS232 2.1" "TTL Serial 1.1" "TTL Serial 1.2" "TTL Serial 2.1" "TTL Serial 2.2" "XTX2_RS232 1.1" "XTX2_RS232 2.1" "XTX2_TTL Serial 1.1" "XTX2_TTL Serial 1.2" "XTX2_TTL Serial 2.1" "XTX2_TTL Serial 2.2" I2C.1 IL_SATA#.1 XTX1_USB01_C1.2 XTX1_USB01_IC1.1 XTX1_USB01_IC1.4 XTX1_USB01_IC1.7 XTX1_USB01_TVS1.4 XTX1_USB01_TVS2.1 XTX1_USB23_C1.2 XTX1_USB23_IC1.1 XTX1_USB23_IC1.4 XTX1_USB23_IC1.7 XTX1_USB23_TVS1.4 XTX1_USB23_TVS2.1 XTX1_USB45_C1.2 XTX1_USB45_IC1.1 XTX1_USB45_IC1.4 XTX1_USB45_IC1.7 XTX1_USB45_TVS1.4 XTX1_USB45_TVS2.1 XTX2_I2C.1 XTX2_IL_SATA#.1 XTX2_USB01_C1.2 XTX2_USB01_IC1.1 XTX2_USB01_IC1.4 XTX2_USB01_IC1.7 XTX2_USB01_TVS1.4 XTX2_USB01_TVS2.1 XTX2_USB23_C1.2 XTX2_USB23_IC1.1 XTX2_USB23_IC1.4 XTX2_USB23_IC1.7 XTX2_USB23_TVS1.4 XTX2_USB23_TVS2.1 XTX2_USB45_C1.2 XTX2_USB45_IC1.1 XTX2_USB45_IC1.4 XTX2_USB45_IC1.7 XTX2_USB45_TVS1.4 XTX2_USB45_TVS2.1
XTX1_B: XTX1_XTX.204
XTX1_DDCK: XTX1_XTX.208
XTX1_DDDA: XTX1_XTX.210
XTX1_ETH_ACTLED#: "XTX1_Interface_Eth Act.2" XTX1_XTX.312
XTX1_ETH_LILED#: "XTX1_Interface_Eth Lil.2" XTX1_XTX.310
XTX1_ETH_RXD_N: EthernetJack_Eth1.8 XTX1_XTX.391
XTX1_ETH_RXD_P: EthernetJack_Eth1.7 XTX1_XTX.393
XTX1_ETH_SPEEDLED#: "XTX1_Interface_Eth Spd.2" XTX1_XTX.314
XTX1_ETH_TXD_N: EthernetJack_Eth1.2 XTX1_XTX.395
XTX1_ETH_TXD_P: EthernetJack_Eth1.1 XTX1_XTX.397
XTX1_G: XTX1_XTX.206
XTX1_HSY: XTX1_XTX.205
XTX1_I2C_CLK: I2C.3 XTX1_XTX.316
XTX1_I2C_DATA: I2C.2 XTX1_XTX.322
XTX1_IL_SATA#: IL_SATA#.2 XTX1_XTX.158
XTX1_Interface_PWGIN: XTX1_Interface_Power.1 XTX1_Interface_Power.2 XTX1_XTX.304
XTX1_Interface_PWRBTN#: XTX1_Interface_Reset.1 XTX1_Interface_Reset.2 XTX1_XTX.307
XTX1_PD0: XTX1_XTX.280
XTX1_PD1: XTX1_XTX.278
XTX1_PD2: XTX1_XTX.276
XTX1_PD3: XTX1_XTX.274
XTX1_PD4: XTX1_XTX.272
XTX1_PD5: XTX1_XTX.268
XTX1_PD6: XTX1_XTX.262
XTX1_PD7: XTX1_XTX.258
XTX1_R: XTX1_XTX.203
XTX1_RXD1: "TTL Serial 1.3" XTX1_XTX.283
XTX1_RXD2: "TTL Serial 2.3" XTX1_XTX.263
XTX1_SATA0_RX_N: XTX1_SATA_SATA4_0.S5 XTX1_XTX.106
XTX1_SATA0_RX_P: XTX1_SATA_SATA4_0.S6 XTX1_XTX.104
XTX1_SATA0_TX_N: XTX1_SATA_SATA4_0.S3 XTX1_XTX.110
XTX1_SATA0_TX_P: XTX1_SATA_SATA4_0.S2 XTX1_XTX.112
XTX1_SATALED#: XTX1_Interface_SATA.2 XTX1_XTX.150
XTX1_Serial_Drvs_IN_RX1: "TTL Serial 1.4" XTX1_Serial_Drvs_U1.12
XTX1_Serial_Drvs_IN_RX2: "TTL Serial 2.4" XTX1_Serial_Drvs_U1.9
XTX1_Serial_Drvs_IN_TX1: "TTL Serial 1.6" XTX1_Serial_Drvs_U1.11
XTX1_Serial_Drvs_IN_TX2: "TTL Serial 2.6" XTX1_Serial_Drvs_U1.10
XTX1_Serial_Drvs_OUT_RX1: "RS232 1.2" XTX1_Serial_Drvs_U1.13
XTX1_Serial_Drvs_OUT_RX2: "RS232 2.2" XTX1_Serial_Drvs_U1.8
XTX1_Serial_Drvs_OUT_TX1: "RS232 1.3" XTX1_Serial_Drvs_U1.14
XTX1_Serial_Drvs_OUT_TX2: "RS232 2.3" XTX1_Serial_Drvs_U1.7
XTX1_TXD1: "TTL Serial 1.5" XTX1_XTX.295
XTX1_TXD2: "TTL Serial 2.5" XTX1_XTX.277
XTX1_USB0.5V: USB1.1 XTX1_USB01_C7.2 XTX1_USB01_L1.2
XTX1_USB0.D_N: USB1.2 XTX1_USB01_TVS1.2 XTX1_XTX.76
XTX1_USB0.D_P: USB1.3 XTX1_USB01_TVS1.3 XTX1_XTX.88
XTX1_USB0.GND: USB1.5 USB1.CGND XTX1_USB01_C6.2 XTX1_USB01_L2.2
XTX1_USB1.5V: USB2.1 XTX1_USB01_C5.2 XTX1_USB01_L3.2
XTX1_USB1.D_N: USB2.2 XTX1_USB01_TVS2.2 XTX1_XTX.80
XTX1_USB1.D_P: USB2.3 XTX1_USB01_TVS2.3 XTX1_XTX.92
XTX1_USB1.GND: USB2.5 USB2.CGND XTX1_USB01_C4.2 XTX1_USB01_L4.2
XTX1_USB2.5V: USB3.1 XTX1_USB23_C7.2 XTX1_USB23_L1.2
XTX1_USB2.D_N: USB3.2 XTX1_USB23_TVS1.2 XTX1_XTX.58
XTX1_USB2.D_P: USB3.3 XTX1_USB23_TVS1.3 XTX1_XTX.66
XTX1_USB2.GND: USB3.5 USB3.CGND XTX1_USB23_C6.2 XTX1_USB23_L2.2
XTX1_USB3.5V: USB4.1 XTX1_USB23_C5.2 XTX1_USB23_L3.2
XTX1_USB3.D_N: USB4.2 XTX1_USB23_TVS2.2 XTX1_XTX.62
XTX1_USB3.D_P: USB4.3 XTX1_USB23_TVS2.3 XTX1_XTX.72
XTX1_USB3.GND: USB4.5 USB4.CGND XTX1_USB23_C4.2 XTX1_USB23_L4.2
XTX1_USB4.5V: USB6.1 XTX1_USB45_C5.2 XTX1_USB45_L3.2
XTX1_USB4.D_N: USB6.2 XTX1_USB45_TVS2.2 XTX1_XTX.147
XTX1_USB4.D_P: USB6.3 XTX1_USB45_TVS2.3 XTX1_XTX.145
XTX1_USB4.GND: USB6.5 USB6.CGND XTX1_USB45_C4.2 XTX1_USB45_L4.2
XTX1_USB5.5V: USB5.1 XTX1_USB45_C7.2 XTX1_USB45_L1.2
XTX1_USB5.D_N: USB5.2 XTX1_USB45_TVS1.2 XTX1_XTX.127
XTX1_USB5.D_P: USB5.3 XTX1_USB45_TVS1.3 XTX1_XTX.125
XTX1_USB5.GND: USB5.5 USB5.CGND XTX1_USB45_C6.2 XTX1_USB45_L2.2
XTX1_USB_OVCR#: XTX1_USB01_IC1.2 XTX1_USB01_IC1.3 XTX1_USB23_IC1.2 XTX1_USB23_IC1.3 XTX1_USB45_IC1.2 XTX1_USB45_IC1.3 XTX1_XTX.319
XTX1_VGA_BFILTERED: XTX1_VGA_C6_5.1 XTX1_VGA_FB6_2.2 XTX1_VGA_VGA6_0.3
XTX1_VGA_BIN: XTX1_VGA_C6_2.1 XTX1_VGA_D6_2.3 XTX1_VGA_FB6_2.1 XTX1_VGA_R6_2.2
XTX1_VGA_DDCKF: XTX1_VGA_FB6_7.2 XTX1_VGA_VGA6_0.15
XTX1_VGA_DDCKIN: XTX1_VGA_FB6_7.1
XTX1_VGA_DDDAF: XTX1_VGA_FB6_4.2 XTX1_VGA_VGA6_0.12
XTX1_VGA_DDDAIN: XTX1_VGA_FB6_4.1
XTX1_VGA_GFILTERED: XTX1_VGA_C6_4.1 XTX1_VGA_FB6_1.2 XTX1_VGA_VGA6_0.2
XTX1_VGA_GIN: XTX1_VGA_C6_1.1 XTX1_VGA_D6_1.3 XTX1_VGA_FB6_1.1 XTX1_VGA_R6_1.2
XTX1_VGA_HSYF: XTX1_VGA_C6_6.2 XTX1_VGA_D6_3.3 XTX1_VGA_FB6_5.2 XTX1_VGA_VGA6_0.13
XTX1_VGA_HSYIN: XTX1_VGA_FB6_5.1
XTX1_VGA_RFILTERED: XTX1_VGA_C6_3.1 XTX1_VGA_FB6_0.2 XTX1_VGA_VGA6_0.1
XTX1_VGA_RIN: XTX1_VGA_C6_0.1 XTX1_VGA_D6_0.3 XTX1_VGA_FB6_0.1 XTX1_VGA_R6_0.2
XTX1_VGA_VGA6CGND: XTX1_VGA_R6_3.2 XTX1_VGA_VGA6_0.CGND
XTX1_VGA_VSYF: XTX1_VGA_C6_7.2 XTX1_VGA_D6_4.3 XTX1_VGA_FB6_6.2 XTX1_VGA_VGA6_0.14
XTX1_VGA_VSYIN: XTX1_VGA_FB6_6.1
XTX1_VSY: XTX1_XTX.207
XTX2_B: XTX2_VGA_C6_2.1 XTX2_VGA_D6_2.3 XTX2_VGA_FB6_2.1 XTX2_VGA_R6_2.2 XTX2_XTX.204
XTX2_DDCK: XTX2_VGA_FB6_7.1 XTX2_XTX.208
XTX2_DDDA: XTX2_VGA_FB6_4.1 XTX2_XTX.210
XTX2_ETH_ACTLED#: "XTX2_Interface_Eth Act.2" XTX2_XTX.312
XTX2_ETH_LILED#: "XTX2_Interface_Eth Lil.2" XTX2_XTX.310
XTX2_ETH_RXD_N: XTX2_EthernetJack_Eth1.8 XTX2_XTX.391
XTX2_ETH_RXD_P: XTX2_EthernetJack_Eth1.7 XTX2_XTX.393
XTX2_ETH_SPEEDLED#: "XTX2_Interface_Eth Spd.2" XTX2_XTX.314
XTX2_ETH_TXD_N: XTX2_EthernetJack_Eth1.2 XTX2_XTX.395
XTX2_ETH_TXD_P: XTX2_EthernetJack_Eth1.1 XTX2_XTX.397
XTX2_G: XTX2_VGA_C6_1.1 XTX2_VGA_D6_1.3 XTX2_VGA_FB6_1.1 XTX2_VGA_R6_1.2 XTX2_XTX.206
XTX2_HSY: XTX2_VGA_FB6_5.1 XTX2_XTX.205
XTX2_I2C_CLK: XTX2_I2C.3 XTX2_XTX.316
XTX2_I2C_DATA: XTX2_I2C.2 XTX2_XTX.322
XTX2_IL_SATA#: XTX2_IL_SATA#.2 XTX2_XTX.158
XTX2_Interface_PWGIN: XTX2_Interface_Power.1 XTX2_Interface_Power.2 XTX2_XTX.304
XTX2_Interface_PWRBTN#: XTX2_Interface_Reset.1 XTX2_Interface_Reset.2 XTX2_XTX.307
XTX2_PD0: XTX2_XTX.280
XTX2_PD1: XTX2_XTX.278
XTX2_PD2: XTX2_XTX.276
XTX2_PD3: XTX2_XTX.274
XTX2_PD4: XTX2_XTX.272
XTX2_PD5: XTX2_XTX.268
XTX2_PD6: XTX2_XTX.262
XTX2_PD7: XTX2_XTX.258
XTX2_R: XTX2_VGA_C6_0.1 XTX2_VGA_D6_0.3 XTX2_VGA_FB6_0.1 XTX2_VGA_R6_0.2 XTX2_XTX.203
XTX2_RXD1: "XTX2_TTL Serial 1.3" XTX2_XTX.283
XTX2_RXD2: "XTX2_TTL Serial 2.3" XTX2_XTX.263
XTX2_SATA0_RX_N: XTX2_SATA_SATA4_0.S5 XTX2_XTX.106
XTX2_SATA0_RX_P: XTX2_SATA_SATA4_0.S6 XTX2_XTX.104
XTX2_SATA0_TX_N: XTX2_SATA_SATA4_0.S3 XTX2_XTX.110
XTX2_SATA0_TX_P: XTX2_SATA_SATA4_0.S2 XTX2_XTX.112
XTX2_SATALED#: XTX2_Interface_SATA.2 XTX2_XTX.150
XTX2_Serial_Drvs_IN_RX1: "XTX2_TTL Serial 1.4" XTX2_Serial_Drvs_U1.12
XTX2_Serial_Drvs_IN_RX2: "XTX2_TTL Serial 2.4" XTX2_Serial_Drvs_U1.9
XTX2_Serial_Drvs_IN_TX1: "XTX2_TTL Serial 1.6" XTX2_Serial_Drvs_U1.11
XTX2_Serial_Drvs_IN_TX2: "XTX2_TTL Serial 2.6" XTX2_Serial_Drvs_U1.10
XTX2_Serial_Drvs_OUT_RX1: "XTX2_RS232 1.2" XTX2_Serial_Drvs_U1.13
XTX2_Serial_Drvs_OUT_RX2: "XTX2_RS232 2.2" XTX2_Serial_Drvs_U1.8
XTX2_Serial_Drvs_OUT_TX1: "XTX2_RS232 1.3" XTX2_Serial_Drvs_U1.14
XTX2_Serial_Drvs_OUT_TX2: "XTX2_RS232 2.3" XTX2_Serial_Drvs_U1.7
XTX2_TXD1: "XTX2_TTL Serial 1.5" XTX2_XTX.295
XTX2_TXD2: "XTX2_TTL Serial 2.5" XTX2_XTX.277
XTX2_USB0.5V: XTX2_USB1.1 XTX2_USB01_C7.2 XTX2_USB01_L1.2
XTX2_USB0.D_N: XTX2_USB1.2 XTX2_USB01_TVS1.2 XTX2_XTX.76
XTX2_USB0.D_P: XTX2_USB1.3 XTX2_USB01_TVS1.3 XTX2_XTX.88
XTX2_USB0.GND: XTX2_USB1.5 XTX2_USB1.CGND XTX2_USB01_C6.2 XTX2_USB01_L2.2
XTX2_USB1.5V: XTX2_USB01_C5.2 XTX2_USB01_L3.2 XTX2_USB2.1
XTX2_USB1.D_N: XTX2_USB01_TVS2.2 XTX2_USB2.2 XTX2_XTX.80
XTX2_USB1.D_P: XTX2_USB01_TVS2.3 XTX2_USB2.3 XTX2_XTX.92
XTX2_USB1.GND: XTX2_USB01_C4.2 XTX2_USB01_L4.2 XTX2_USB2.5 XTX2_USB2.CGND
XTX2_USB2.5V: XTX2_USB3.1 XTX2_USB23_C7.2 XTX2_USB23_L1.2
XTX2_USB2.D_N: XTX2_USB3.2 XTX2_USB23_TVS1.2 XTX2_XTX.58
XTX2_USB2.D_P: XTX2_USB3.3 XTX2_USB23_TVS1.3 XTX2_XTX.66
XTX2_USB2.GND: XTX2_USB3.5 XTX2_USB3.CGND XTX2_USB23_C6.2 XTX2_USB23_L2.2
XTX2_USB3.5V: XTX2_USB4.1 XTX2_USB23_C5.2 XTX2_USB23_L3.2
XTX2_USB3.D_N: XTX2_USB4.2 XTX2_USB23_TVS2.2 XTX2_XTX.62
XTX2_USB3.D_P: XTX2_USB4.3 XTX2_USB23_TVS2.3 XTX2_XTX.72
XTX2_USB3.GND: XTX2_USB4.5 XTX2_USB4.CGND XTX2_USB23_C4.2 XTX2_USB23_L4.2
XTX2_USB4.5V: XTX2_USB6.1 XTX2_USB45_C5.2 XTX2_USB45_L3.2
XTX2_USB4.D_N: XTX2_USB6.2 XTX2_USB45_TVS2.2 XTX2_XTX.147
XTX2_USB4.D_P: XTX2_USB6.3 XTX2_USB45_TVS2.3 XTX2_XTX.145
XTX2_USB4.GND: XTX2_USB6.5 XTX2_USB6.CGND XTX2_USB45_C4.2 XTX2_USB45_L4.2
XTX2_USB5.5V: XTX2_USB5.1 XTX2_USB45_C7.2 XTX2_USB45_L1.2
XTX2_USB5.D_N: XTX2_USB5.2 XTX2_USB45_TVS1.2 XTX2_XTX.127
XTX2_USB5.D_P: XTX2_USB5.3 XTX2_USB45_TVS1.3 XTX2_XTX.125
XTX2_USB5.GND: XTX2_USB5.5 XTX2_USB5.CGND XTX2_USB45_C6.2 XTX2_USB45_L2.2
XTX2_USB_OVCR#: XTX2_USB01_IC1.2 XTX2_USB01_IC1.3 XTX2_USB23_IC1.2 XTX2_USB23_IC1.3 XTX2_USB45_IC1.2 XTX2_USB45_IC1.3 XTX2_XTX.319
XTX2_VGA_BFILTERED: XTX2_VGA_C6_5.1 XTX2_VGA_FB6_2.2 XTX2_VGA_VGA6_0.3
XTX2_VGA_DDCKF: XTX2_VGA_FB6_7.2 XTX2_VGA_VGA6_0.15
XTX2_VGA_DDDAF: XTX2_VGA_FB6_4.2 XTX2_VGA_VGA6_0.12
XTX2_VGA_GFILTERED: XTX2_VGA_C6_4.1 XTX2_VGA_FB6_1.2 XTX2_VGA_VGA6_0.2
XTX2_VGA_HSYF: XTX2_VGA_C6_6.2 XTX2_VGA_D6_3.3 XTX2_VGA_FB6_5.2 XTX2_VGA_VGA6_0.13
XTX2_VGA_RFILTERED: XTX2_VGA_C6_3.1 XTX2_VGA_FB6_0.2 XTX2_VGA_VGA6_0.1
XTX2_VGA_VGA6CGND: XTX2_VGA_R6_3.2 XTX2_VGA_VGA6_0.CGND
XTX2_VGA_VSYF: XTX2_VGA_C6_7.2 XTX2_VGA_D6_4.3 XTX2_VGA_FB6_6.2 XTX2_VGA_VGA6_0.14
XTX2_VGA_VSYIN: XTX2_VGA_FB6_6.1 XTX2_XTX.207
pads on no net: "12V Out." "Power In." EthernetJack_Eth1. EthernetJack_Eth1.9 EthernetJack_Eth1.10 EthernetJack_Eth1.11 EthernetJack_Eth1.12 USB1.4 USB1.11 USB1.12 USB2.4 USB2.11 USB2.12 USB3.4 USB3.11 USB3.12 USB4.4 USB4.11 USB4.12 USB5.4 USB5.11 USB5.12 USB6.4 USB6.11 USB6.12 XTX1_D*1.2 XTX1_SATA_SATA4_0. XTX1_SATA_SATA4_0.P11 XTX1_VGA_VGA6_0.4 XTX1_VGA_VGA6_0.11 XTX1_XTX.0 XTX1_XTX.3 XTX1_XTX.4 XTX1_XTX.7 XTX1_XTX.8 XTX1_XTX.9 XTX1_XTX.10 XTX1_XTX.11 XTX1_XTX.13 XTX1_XTX.14 XTX1_XTX.15 XTX1_XTX.17 XTX1_XTX.18 XTX1_XTX.21 XTX1_XTX.22 XTX1_XTX.23 XTX1_XTX.25 XTX1_XTX.26 XTX1_XTX.27 XTX1_XTX.28 XTX1_XTX.29 XTX1_XTX.30 XTX1_XTX.31 XTX1_XTX.32 XTX1_XTX.33 XTX1_XTX.34 XTX1_XTX.37 XTX1_XTX.38 XTX1_XTX.39 XTX1_XTX.40 XTX1_XTX.41 XTX1_XTX.42 XTX1_XTX.43 XTX1_XTX.44 XTX1_XTX.45 XTX1_XTX.46 XTX1_XTX.47 XTX1_XTX.48 XTX1_XTX.49 XTX1_XTX.50 XTX1_XTX.53 XTX1_XTX.54 XTX1_XTX.55 XTX1_XTX.56 XTX1_XTX.57 XTX1_XTX.59 XTX1_XTX.60 XTX1_XTX.61 XTX1_XTX.63 XTX1_XTX.64 XTX1_XTX.65 XTX1_XTX.69 XTX1_XTX.70 XTX1_XTX.71 XTX1_XTX.73 XTX1_XTX.74 XTX1_XTX.75 XTX1_XTX.77 XTX1_XTX.78 XTX1_XTX.79 XTX1_XTX.81 XTX1_XTX.82 XTX1_XTX.85 XTX1_XTX.86 XTX1_XTX.87 XTX1_XTX.89 XTX1_XTX.90 XTX1_XTX.91 XTX1_XTX.93 XTX1_XTX.94 XTX1_XTX.95 XTX1_XTX.96 XTX1_XTX.97 XTX1_XTX.98 XTX1_XTX.103 XTX1_XTX.105 XTX1_XTX.109 XTX1_XTX.111 XTX1_XTX.115 XTX1_XTX.116 XTX1_XTX.117 XTX1_XTX.118 XTX1_XTX.121 XTX1_XTX.122 XTX1_XTX.123 XTX1_XTX.124 XTX1_XTX.128 XTX1_XTX.130 XTX1_XTX.131 XTX1_XTX.132 XTX1_XTX.133 XTX1_XTX.134 XTX1_XTX.137 XTX1_XTX.138 XTX1_XTX.139 XTX1_XTX.140 XTX1_XTX.141 XTX1_XTX.143 XTX1_XTX.144 XTX1_XTX.146 XTX1_XTX.148 XTX1_XTX.149 XTX1_XTX.153 XTX1_XTX.154 XTX1_XTX.155 XTX1_XTX.156 XTX1_XTX.159 XTX1_XTX.160 XTX1_XTX.161 XTX1_XTX.162 XTX1_XTX.163 XTX1_XTX.164 XTX1_XTX.165 XTX1_XTX.166 XTX1_XTX.169 XTX1_XTX.170 XTX1_XTX.171 XTX1_XTX.172 XTX1_XTX.175 XTX1_XTX.176 XTX1_XTX.177 XTX1_XTX.178 XTX1_XTX.179 XTX1_XTX.181 XTX1_XTX.182 XTX1_XTX.185 XTX1_XTX.186 XTX1_XTX.187 XTX1_XTX.188 XTX1_XTX.189 XTX1_XTX.190 XTX1_XTX.191 XTX1_XTX.192 XTX1_XTX.193 XTX1_XTX.194 XTX1_XTX.195 XTX1_XTX.196 XTX1_XTX.197 XTX1_XTX.198 XTX1_XTX.209 XTX1_XTX.211 XTX1_XTX.212 XTX1_XTX.213 XTX1_XTX.214 XTX1_XTX.217 XTX1_XTX.218 XTX1_XTX.219 XTX1_XTX.220 XTX1_XTX.223 XTX1_XTX.224 XTX1_XTX.225 XTX1_XTX.226 XTX1_XTX.229 XTX1_XTX.230 XTX1_XTX.231 XTX1_XTX.232 XTX1_XTX.235 XTX1_XTX.236 XTX1_XTX.237 XTX1_XTX.238 XTX1_XTX.241 XTX1_XTX.242 XTX1_XTX.243 XTX1_XTX.244 XTX1_XTX.245 XTX1_XTX.246 XTX1_XTX.247 XTX1_XTX.248 XTX1_XTX.249 XTX1_XTX.250 XTX1_XTX.252 XTX1_XTX.255 XTX1_XTX.256 XTX1_XTX.257 XTX1_XTX.259 XTX1_XTX.260 XTX1_XTX.261 XTX1_XTX.264 XTX1_XTX.267 XTX1_XTX.269 XTX1_XTX.270 XTX1_XTX.271 XTX1_XTX.273 XTX1_XTX.275 XTX1_XTX.279 XTX1_XTX.284 XTX1_XTX.285 XTX1_XTX.286 XTX1_XTX.287 XTX1_XTX.288 XTX1_XTX.289 XTX1_XTX.290 XTX1_XTX.291 XTX1_XTX.292 XTX1_XTX.293 XTX1_XTX.294 XTX1_XTX.296 XTX1_XTX.297 XTX1_XTX.298 XTX1_XTX.305 XTX1_XTX.306 XTX1_XTX.309 XTX1_XTX.311 XTX1_XTX.313 XTX1_XTX.315 XTX1_XTX.320 XTX1_XTX.321 XTX1_XTX.323 XTX1_XTX.324 XTX1_XTX.325 XTX1_XTX.326 XTX1_XTX.327 XTX1_XTX.328 XTX1_XTX.329 XTX1_XTX.330 XTX1_XTX.331 XTX1_XTX.332 XTX1_XTX.335 XTX1_XTX.336 XTX1_XTX.337 XTX1_XTX.338 XTX1_XTX.339 XTX1_XTX.340 XTX1_XTX.341 XTX1_XTX.342 XTX1_XTX.343 XTX1_XTX.344 XTX1_XTX.345 XTX1_XTX.346 XTX1_XTX.347 XTX1_XTX.348 XTX1_XTX.351 XTX1_XTX.352 XTX1_XTX.353 XTX1_XTX.354 XTX1_XTX.355 XTX1_XTX.356 XTX1_XTX.357 XTX1_XTX.358 XTX1_XTX.359 XTX1_XTX.360 XTX1_XTX.361 XTX1_XTX.362 XTX1_XTX.363 XTX1_XTX.364 XTX1_XTX.367 XTX1_XTX.368 XTX1_XTX.369 XTX1_XTX.370 XTX1_XTX.371 XTX1_XTX.372 XTX1_XTX.373 XTX1_XTX.374 XTX1_XTX.375 XTX1_XTX.376 XTX1_XTX.377 XTX1_XTX.378 XTX1_XTX.379 XTX1_XTX.380 XTX1_XTX.383 XTX1_XTX.384 XTX1_XTX.385 XTX1_XTX.386 XTX1_XTX.387 XTX1_XTX.388 XTX1_XTX.389 XTX1_XTX.390 XTX1_XTX.392 XTX1_XTX.394 XTX1_XTX.396 XTX1_XTX.398 XTX2_D*1.2 XTX2_EthernetJack_Eth1. XTX2_EthernetJack_Eth1.9 XTX2_EthernetJack_Eth1.10 XTX2_EthernetJack_Eth1.11 XTX2_EthernetJack_Eth1.12 XTX2_SATA_SATA4_0. XTX2_SATA_SATA4_0.P11 XTX2_USB1.4 XTX2_USB1.11 XTX2_USB1.12 XTX2_USB2.4 XTX2_USB2.11 XTX2_USB2.12 XTX2_USB3.4 XTX2_USB3.11 XTX2_USB3.12 XTX2_USB4.4 XTX2_USB4.11 XTX2_USB4.12 XTX2_USB5.4 XTX2_USB5.11 XTX2_USB5.12 XTX2_USB6.4 XTX2_USB6.11 XTX2_USB6.12 XTX2_VGA_VGA6_0.4 XTX2_VGA_VGA6_0.11 XTX2_XTX.0 XTX2_XTX.3 XTX2_XTX.4 XTX2_XTX.7 XTX2_XTX.8 XTX2_XTX.9 XTX2_XTX.10 XTX2_XTX.11 XTX2_XTX.13 XTX2_XTX.14 XTX2_XTX.15 XTX2_XTX.17 XTX2_XTX.18 XTX2_XTX.21 XTX2_XTX.22 XTX2_XTX.23 XTX2_XTX.25 XTX2_XTX.26 XTX2_XTX.27 XTX2_XTX.28 XTX2_XTX.29 XTX2_XTX.30 XTX2_XTX.31 XTX2_XTX.32 XTX2_XTX.33 XTX2_XTX.34 XTX2_XTX.37 XTX2_XTX.38 XTX2_XTX.39 XTX2_XTX.40 XTX2_XTX.41 XTX2_XTX.42 XTX2_XTX.43 XTX2_XTX.44 XTX2_XTX.45 XTX2_XTX.46 XTX2_XTX.47 XTX2_XTX.48 XTX2_XTX.49 XTX2_XTX.50 XTX2_XTX.53 XTX2_XTX.54 XTX2_XTX.55 XTX2_XTX.56 XTX2_XTX.57 XTX2_XTX.59 XTX2_XTX.60 XTX2_XTX.61 XTX2_XTX.63 XTX2_XTX.64 XTX2_XTX.65 XTX2_XTX.69 XTX2_XTX.70 XTX2_XTX.71 XTX2_XTX.73 XTX2_XTX.74 XTX2_XTX.75 XTX2_XTX.77 XTX2_XTX.78 XTX2_XTX.79 XTX2_XTX.81 XTX2_XTX.82 XTX2_XTX.85 XTX2_XTX.86 XTX2_XTX.87 XTX2_XTX.89 XTX2_XTX.90 XTX2_XTX.91 XTX2_XTX.93 XTX2_XTX.94 XTX2_XTX.95 XTX2_XTX.96 XTX2_XTX.97 XTX2_XTX.98 XTX2_XTX.103 XTX2_XTX.105 XTX2_XTX.109 XTX2_XTX.111 XTX2_XTX.115 XTX2_XTX.116 XTX2_XTX.117 XTX2_XTX.118 XTX2_XTX.121 XTX2_XTX.122 XTX2_XTX.123 XTX2_XTX.124 XTX2_XTX.128 XTX2_XTX.130 XTX2_XTX.131 XTX2_XTX.132 XTX2_XTX.133 XTX2_XTX.134 XTX2_XTX.137 XTX2_XTX.138 XTX2_XTX.139 XTX2_XTX.140 XTX2_XTX.141 XTX2_XTX.143 XTX2_XTX.144 XTX2_XTX.146 XTX2_XTX.148 XTX2_XTX.149 XTX2_XTX.153 XTX2_XTX.154 XTX2_XTX.155 XTX2_XTX.156 XTX2_XTX.159 XTX2_XTX.160 XTX2_XTX.161 XTX2_XTX.162 XTX2_XTX.163 XTX2_XTX.164 XTX2_XTX.165 XTX2_XTX.166 XTX2_XTX.169 XTX2_XTX.170 XTX2_XTX.171 XTX2_XTX.172 XTX2_XTX.175 XTX2_XTX.176 XTX2_XTX.177 XTX2_XTX.178 XTX2_XTX.179 XTX2_XTX.181 XTX2_XTX.182 XTX2_XTX.185 XTX2_XTX.186 XTX2_XTX.187 XTX2_XTX.188 XTX2_XTX.189 XTX2_XTX.190 XTX2_XTX.191 XTX2_XTX.192 XTX2_XTX.193 XTX2_XTX.194 XTX2_XTX.195 XTX2_XTX.196 XTX2_XTX.197 XTX2_XTX.198 XTX2_XTX.209 XTX2_XTX.211 XTX2_XTX.212 XTX2_XTX.213 XTX2_XTX.214 XTX2_XTX.217 XTX2_XTX.218 XTX2_XTX.219 XTX2_XTX.220 XTX2_XTX.223 XTX2_XTX.224 XTX2_XTX.225 XTX2_XTX.226 XTX2_XTX.229 XTX2_XTX.230 XTX2_XTX.231 XTX2_XTX.232 XTX2_XTX.235 XTX2_XTX.236 XTX2_XTX.237 XTX2_XTX.238 XTX2_XTX.241 XTX2_XTX.242 XTX2_XTX.243 XTX2_XTX.244 XTX2_XTX.245 XTX2_XTX.246 XTX2_XTX.247 XTX2_XTX.248 XTX2_XTX.249 XTX2_XTX.250 XTX2_XTX.252 XTX2_XTX.255 XTX2_XTX.256 XTX2_XTX.257 XTX2_XTX.259 XTX2_XTX.260 XTX2_XTX.261 XTX2_XTX.264 XTX2_XTX.267 XTX2_XTX.269 XTX2_XTX.270 XTX2_XTX.271 XTX2_XTX.273 XTX2_XTX.275 XTX2_XTX.279 XTX2_XTX.284 XTX2_XTX.285 XTX2_XTX.286 XTX2_XTX.287 XTX2_XTX.288 XTX2_XTX.289 XTX2_XTX.290 XTX2_XTX.291 XTX2_XTX.292 XTX2_XTX.293 XTX2_XTX.294 XTX2_XTX.296 XTX2_XTX.297 XTX2_XTX.298 XTX2_XTX.305 XTX2_XTX.306 XTX2_XTX.309 XTX2_XTX.311 XTX2_XTX.313 XTX2_XTX.315 XTX2_XTX.320 XTX2_XTX.321 XTX2_XTX.323 XTX2_XTX.324 XTX2_XTX.325 XTX2_XTX.326 XTX2_XTX.327 XTX2_XTX.328 XTX2_XTX.329 XTX2_XTX.330 XTX2_XTX.331 XTX2_XTX.332 XTX2_XTX.335 XTX2_XTX.336 XTX2_XTX.337 XTX2_XTX.338 XTX2_XTX.339 XTX2_XTX.340 XTX2_XTX.341 XTX2_XTX.342 XTX2_XTX.343 XTX2_XTX.344 XTX2_XTX.345 XTX2_XTX.346 XTX2_XTX.347 XTX2_XTX.348 XTX2_XTX.351 XTX2_XTX.352 XTX2_XTX.353 XTX2_XTX.354 XTX2_XTX.355 XTX2_XTX.356 XTX2_XTX.357 XTX2_XTX.358 XTX2_XTX.359 XTX2_XTX.360 XTX2_XTX.361 XTX2_XTX.362 XTX2_XTX.363 XTX2_XTX.364 XTX2_XTX.367 XTX2_XTX.368 XTX2_XTX.369 XTX2_XTX.370 XTX2_XTX.371 XTX2_XTX.372 XTX2_XTX.373 XTX2_XTX.374 XTX2_XTX.375 XTX2_XTX.376 XTX2_XTX.377 XTX2_XTX.378 XTX2_XTX.379 XTX2_XTX.380 XTX2_XTX.383 XTX2_XTX.384 XTX2_XTX.385 XTX2_XTX.386 XTX2_XTX.387 XTX2_XTX.388 XTX2_XTX.389 XTX2_XTX.390 XTX2_XTX.392 XTX2_XTX.394 XTX2_XTX.396 XTX2_XTX.398

## Text inside footprints (layer, text, board x,y; h text height)
"TTL Serial 1": Top Overlay "2" at -250.759,-38.335 h1.27 r90; Top Overlay "1" at -248.219,-37.827 h1.27 r90; Top Overlay "7" at -248.219,-26.651 h1.27 r90; Top Overlay "8" at -250.759,-26.651 h1.27 r90
"TTL Serial 2": Top Overlay "2" at -281.366,-38.335 h1.27 r90; Top Overlay "1" at -278.826,-37.827 h1.27 r90; Top Overlay "7" at -278.826,-26.651 h1.27 r90; Top Overlay "8" at -281.366,-26.651 h1.27 r90
XTX1_XTX: Top Overlay "X1" at -266.396,46.47 h2 r180; Top Overlay "X2" at -266.396,4.87 h2 r180; Top Overlay "X3" at -160.221,50.445 h2 r180; Top Overlay "X4" at -160.221,4.77 h2 r180
"XTX2_TTL Serial 1": Top Overlay "8" at 82.468,12.604 h1.27 r90; Top Overlay "7" at 85.008,12.604 h1.27 r90; Top Overlay "1" at 85.008,1.428 h1.27 r90; Top Overlay "2" at 82.468,0.92 h1.27 r90
"XTX2_TTL Serial 2": Top Overlay "8" at 36.468,12.604 h1.27 r90; Top Overlay "7" at 39.008,12.604 h1.27 r90; Top Overlay "1" at 39.008,1.428 h1.27 r90; Top Overlay "2" at 36.468,0.92 h1.27 r90
XTX2_XTX: Top Overlay "X1" at -25.874,49.276 h2; Top Overlay "X2" at -25.874,90.876 h2; Top Overlay "X3" at -132.049,45.301 h2; Top Overlay "X4" at -132.049,90.976 h2